# Altium PCB 24E_Ergo.PcbDoc
Units mm, origin at the board's own origin, x right, y up, seen from the top; angles counter-clockwise.
Board outline 152.4 x 101.6 mm, 4 copper layers (Top Layer, GND, PWR, Bottom Layer), stack 0.603 mm thick; 67 components, 60 nets, 266 pads, 0 vias.
Unrouted connection lines stored in the file: 154.
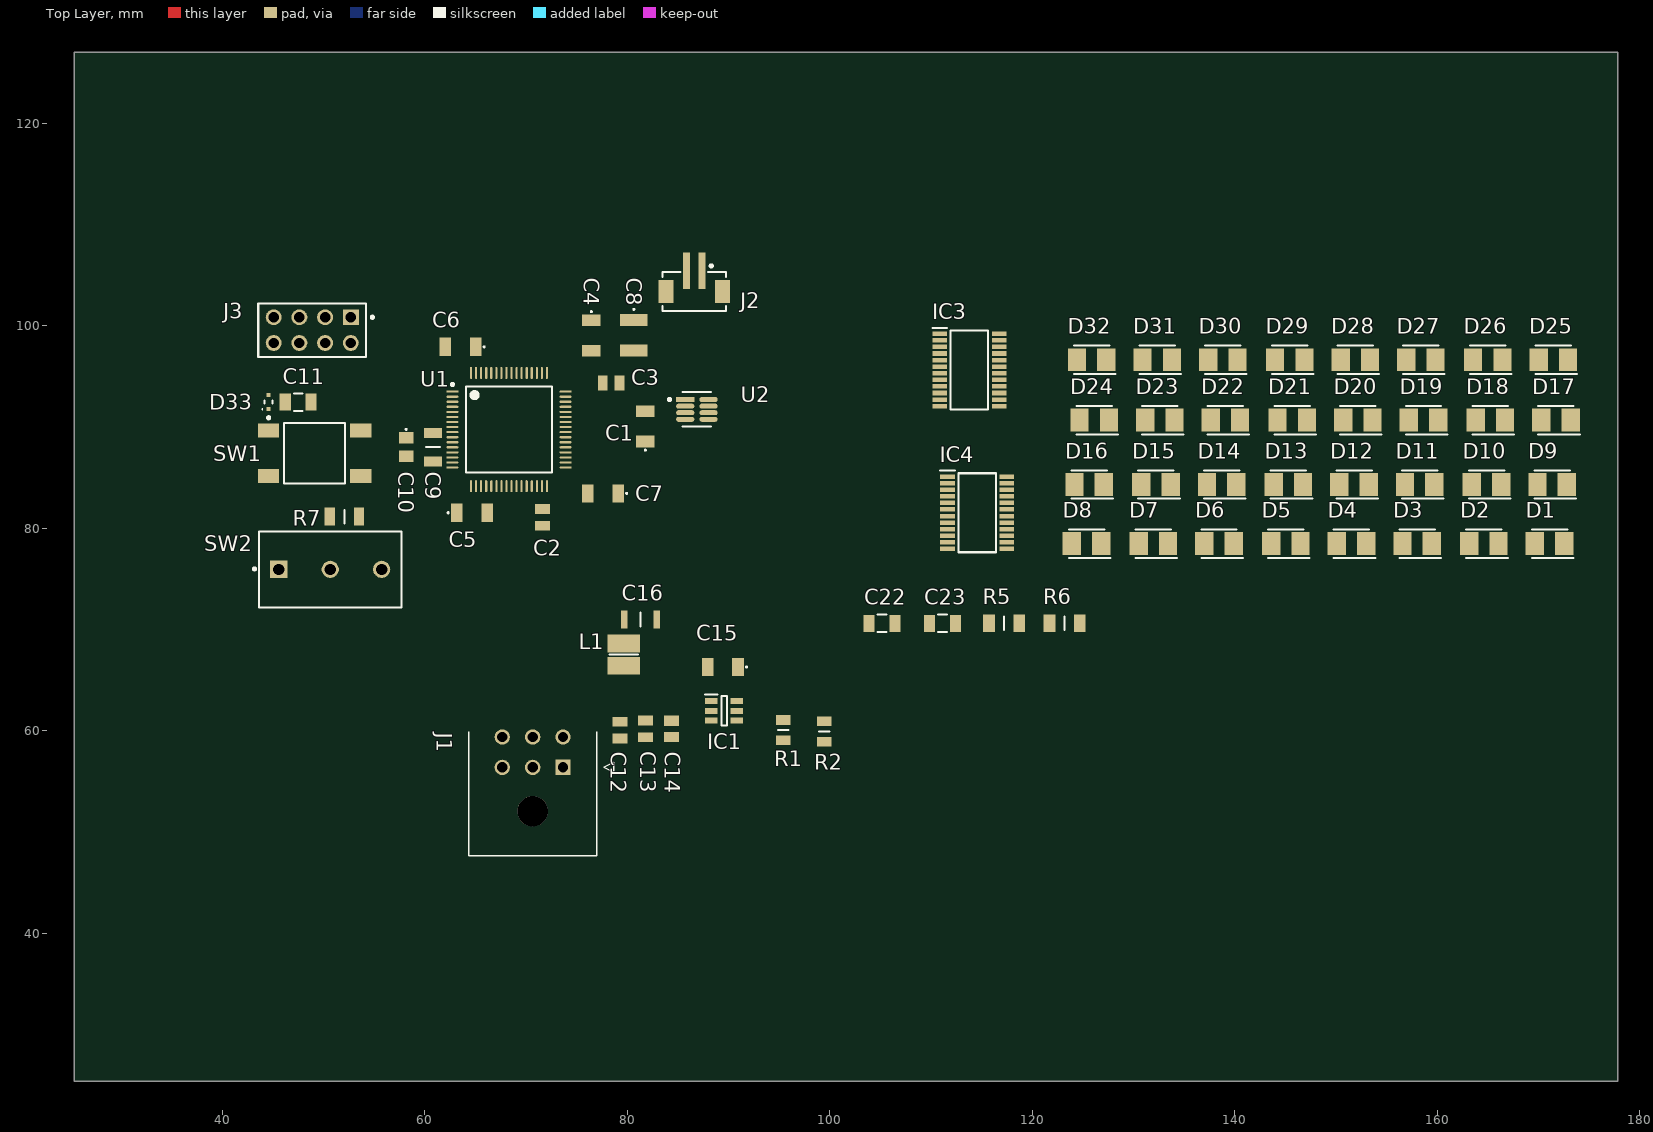
[diagram p0: Top Layer view]
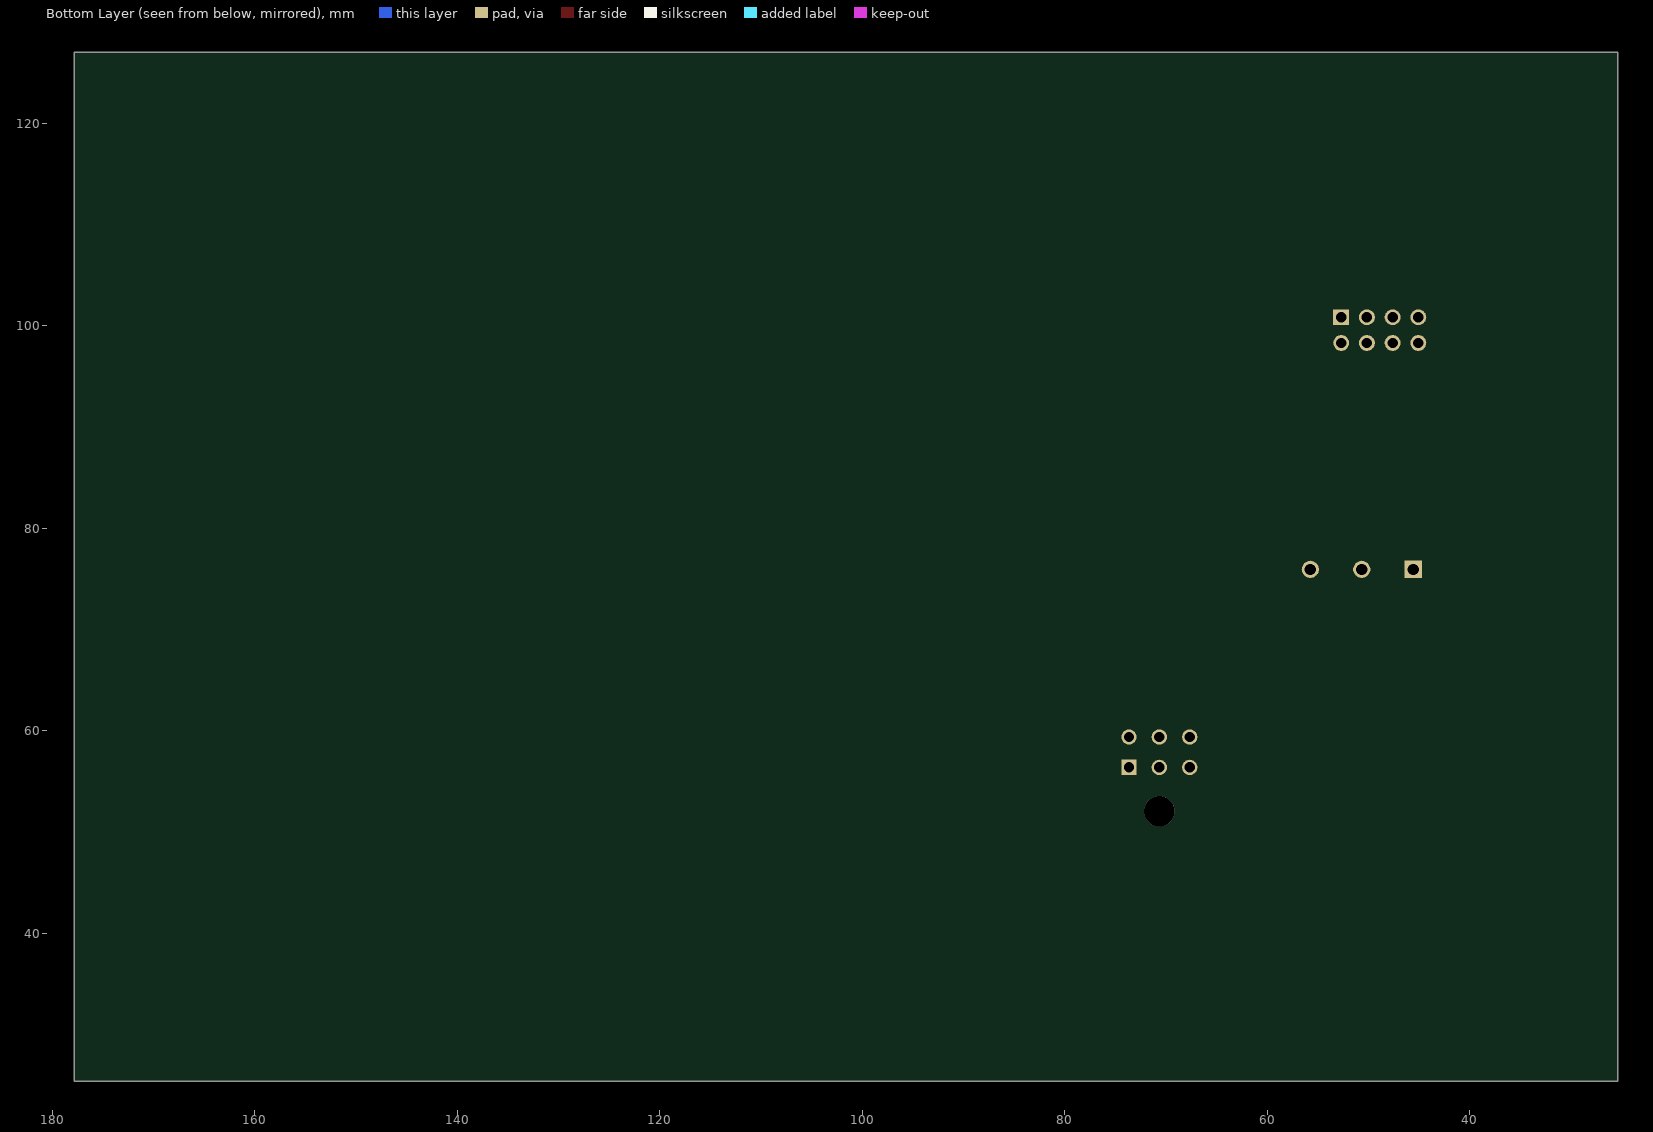
[diagram p1: Bottom Layer view, seen from below]
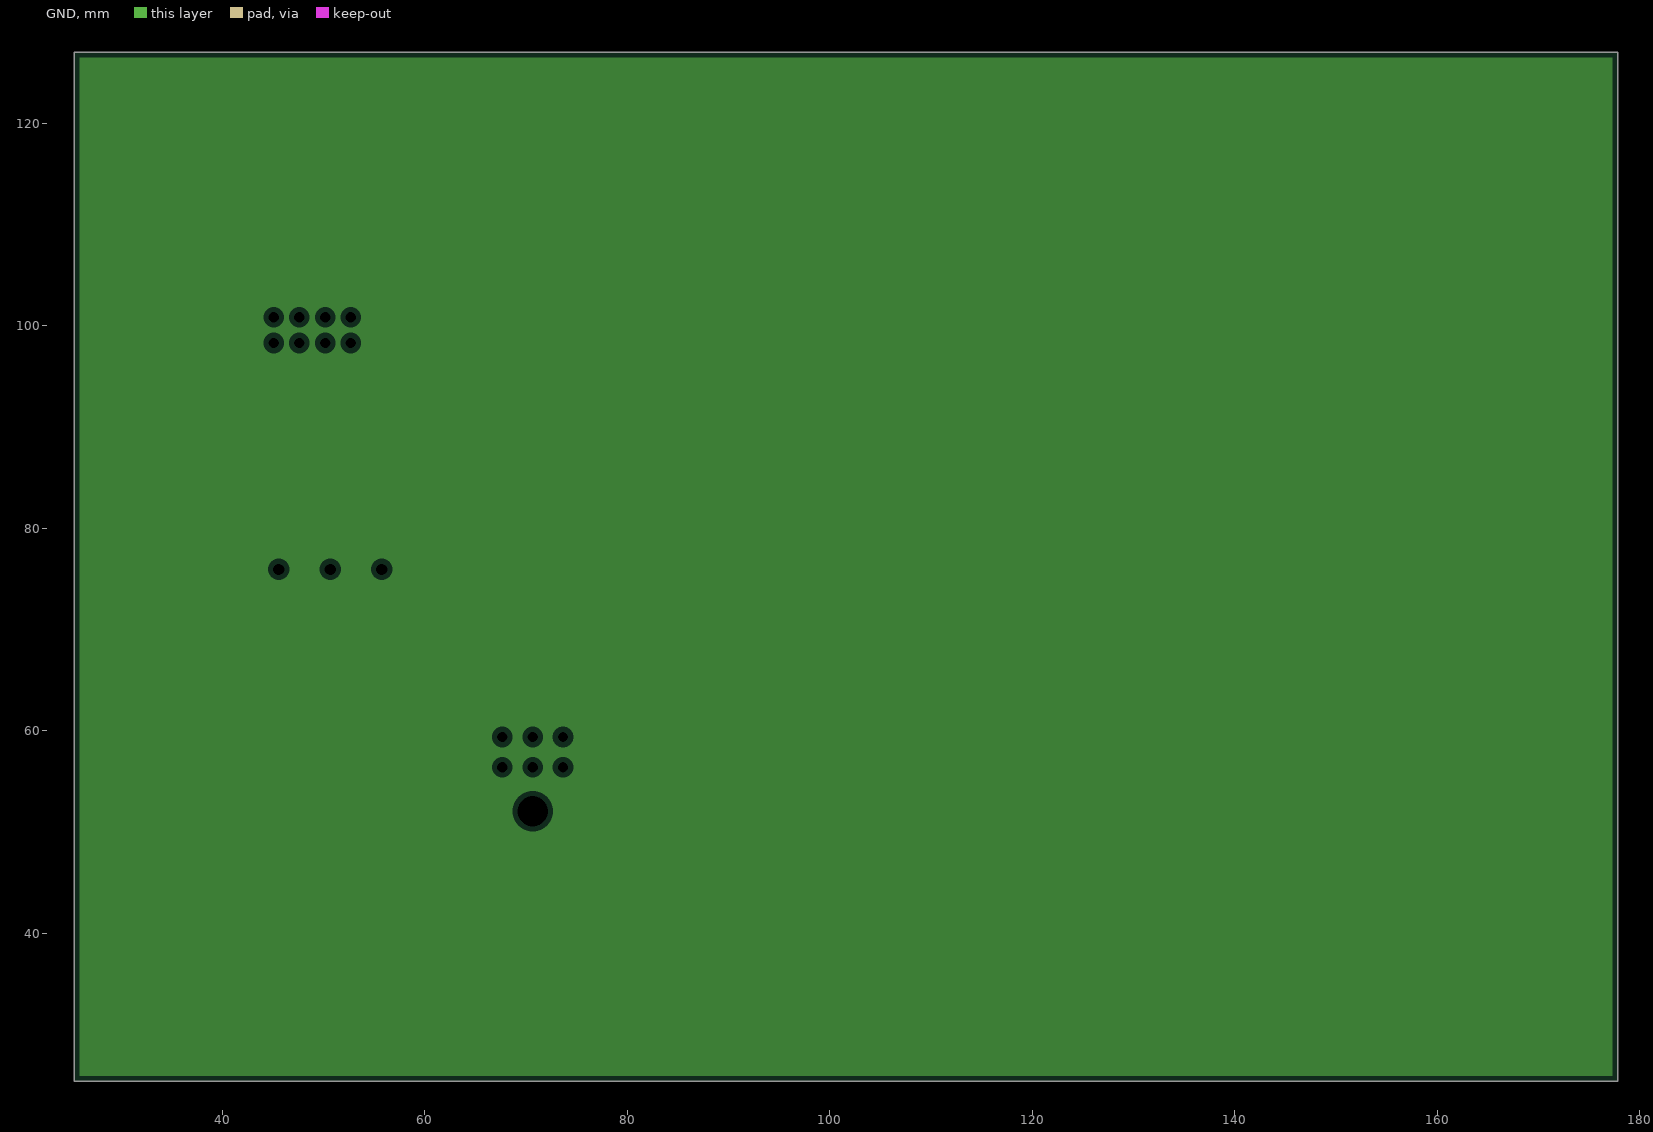
[diagram p2: GND, clearances drawn from the general rule]
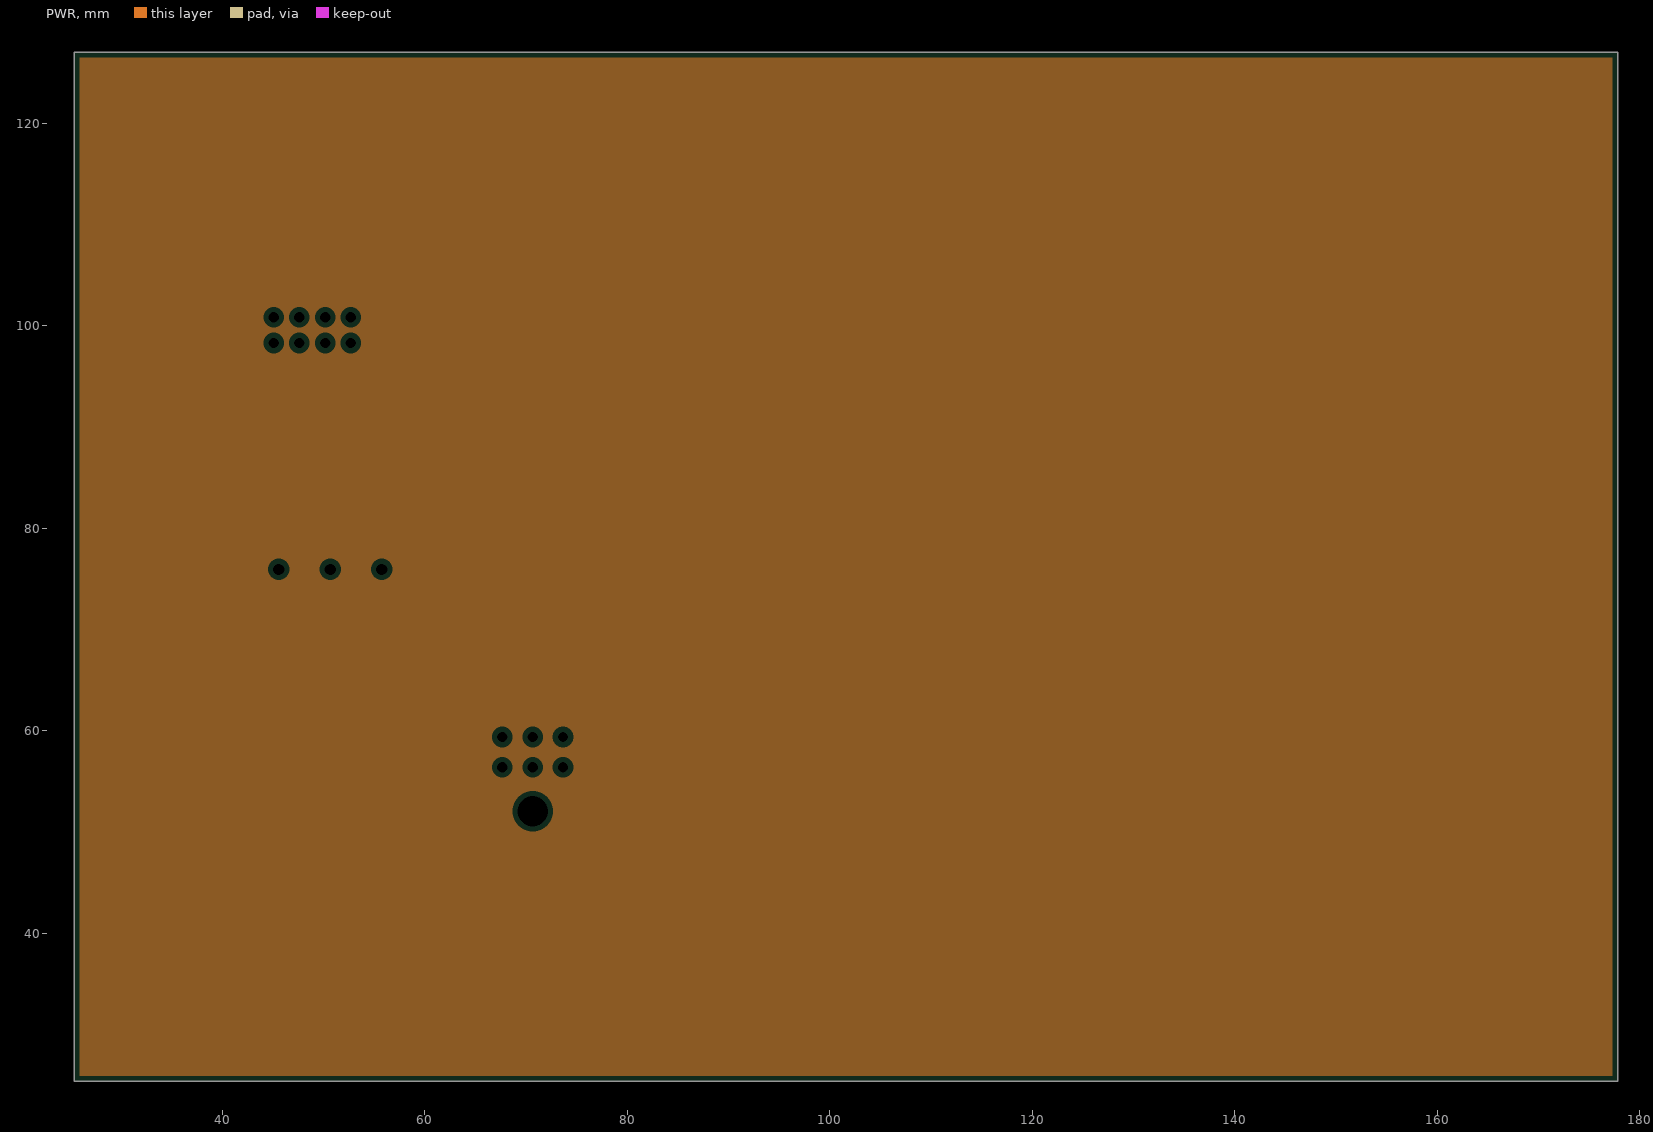
[diagram p3: PWR, clearances drawn from the general rule]

## Layer stack, top to bottom
Top Solder: solder mask 0.0102, Solder Resist, Dk 3.5
Top Layer: signal copper 0.0356
Dielectric 2: prepreg 0.0711, PP-006, Dk 4.1
GND: plane copper 0.035
Dielectric 1: dielectric 0.32, FR-4, Dk 4.8
PWR: plane copper 0.035
Dielectric 3: prepreg 0.0711, PP-006, Dk 4.1
Bottom Layer: signal copper 0.0356
Bottom Solder: solder mask 0.0102, Solder Resist, Dk 3.5

## Board outline
25.4,25.4 177.8,25.4 177.8,127 25.4,127

## Design rules (kind name [scope] priority, off if disabled: settings)
Clearance [All] p1: gap=0.254 ignorepadtopadclearanceinfootprint=FALSE
PlaneClearance [All] p1: clearance=0.508
PlaneConnect [All] p1: planeconnectstyle=Relief reliefexpansion=0.508 reliefentries=4 reliefconductorwidth=0.254 reliefairgap=0.254
PolygonConnect [All] p1: connectstyle=Relief reliefconductorwidth=0.254 reliefentries=4 polygonreliefangle="90 Angle" airgapwidth=0.254
RoutingVias [All] p1: holewidth=0.711 width=1.27 viastyle="Through Hole" minholewidth=0.711 minwidth=1.27 maxholewidth=0.711 maxwidth=1.27
SolderMaskExpansion [All] p1: expansion=0.102 istentingtop=FALSE
SupplyNets "Schematic Supply Nets_4" [InNet('+3.3 V')] p1: voltage=0.000
SupplyNets "Schematic Supply Nets_3" [InNet('+12.8V')] p2: voltage=0.000
SupplyNets "Schematic Supply Nets_2" [InNet('+3.3V')] p3: voltage=0.000
SupplyNets "Schematic Supply Nets_1" [InNet('EN')] p4: voltage=0.000
SupplyNets "Schematic Supply Nets" [InNet('+3V3')] p5: voltage=0.000
Width [All] p1: maxlimit=0.254 minlimit=0.254 preferedwidth=0.254
28 further rules are at their usual default settings.

## Components (designator, comment, footprint, x,y, rotation, side; value= is the part's Value field where it differs from the comment)
C1 "100nF" C1206 81.788,90.067 r90 top
C2 "2.2uF" CAPC2012X145N 71.628,81.085 r90 top
C3 "2.2uF" CAPC2012X145N 78.418,94.361 r0 top
C4 "100nF" C1206 76.454,99.036 r270 top
C5 "100nF" C1206 64.667,81.534 r0 top
C6 "100nF" C1206 63.524,97.917 r180 top
C7 "100nF" C1206 77.597,83.439 r180 top
C8 "4.7 uF" C1210 80.645,99.06 r270 top
C9 "100nF" CAPC3216X95N 60.833,88.011 r270 top
C10 "1.0uF" C0805 58.166,88.022 r270 top
C11 "100 nF" FP-CL31-IPC_C 47.498,92.456 r0 top
C12 "10uF" CAPC2012X145N 79.272,60.071 r270 top
C13 "10uF" CAPC2012X145N 81.812,60.198 r270 top
C14 "100nF" CAPC2012X88N 84.352,60.198 r270 top
C15 "C1206C104K3RACTU" C1206 89.432,66.294 r180 top
C16 "47uF" CAPC3216X180N 81.304,70.993 r0 top
C22 "CL31B104KBP5PNF" FP-CL31-IPC_C 105.156,70.612 r0 top
C23 "CL31B104KBP5PNF" FP-CL31-IPC_C 111.125,70.612 r0 top
D1 "LR_T64F-BBDB-1-1" LEDM3528X380N 171.069,78.486 r180 top
D2 "LR_T64F-BBDB-1-1" LEDM3528X380N 164.592,78.486 r180 top
D3 "LR_T64F-BBDB-1-1" LEDM3528X380N 157.988,78.486 r180 top
D4 "LR_T64F-BBDB-1-1" LEDM3528X380N 151.511,78.486 r180 top
D5 "LR_T64F-BBDB-1-1" LEDM3528X380N 145.034,78.486 r180 top
D6 "LR_T64F-BBDB-1-1" LEDM3528X380N 138.43,78.486 r180 top
D7 "LR_T64F-BBDB-1-1" LEDM3528X380N 131.953,78.486 r180 top
D8 "LR_T64F-BBDB-1-1" LEDM3528X380N 125.349,78.486 r180 top
D9 "LR_T64F-BBDB-1-1" LEDM3528X380N 171.323,84.328 r180 top
D10 "LR_T64F-BBDB-1-1" LEDM3528X380N 164.846,84.328 r180 top
D11 "LR_T64F-BBDB-1-1" LEDM3528X380N 158.242,84.328 r180 top
D12 "LR_T64F-BBDB-1-1" LEDM3528X380N 151.765,84.328 r180 top
D13 "LR_T64F-BBDB-1-1" LEDM3528X380N 145.288,84.328 r180 top
D14 "LR_T64F-BBDB-1-1" LEDM3528X380N 138.684,84.328 r180 top
D15 "LR_T64F-BBDB-1-1" LEDM3528X380N 132.207,84.328 r180 top
D16 "LR_T64F-BBDB-1-1" LEDM3528X380N 125.603,84.328 r180 top
D17 "LR_T64F-BBDB-1-1" LEDM3528X380N 171.704,90.678 r180 top
D18 "LR_T64F-BBDB-1-1" LEDM3528X380N 165.227,90.678 r180 top
D19 "LR_T64F-BBDB-1-1" LEDM3528X380N 158.623,90.678 r180 top
D20 "LR_T64F-BBDB-1-1" LEDM3528X380N 152.146,90.678 r180 top
D21 "LR_T64F-BBDB-1-1" LEDM3528X380N 145.669,90.678 r180 top
D22 "LR_T64F-BBDB-1-1" LEDM3528X380N 139.065,90.678 r180 top
D23 "LR_T64F-BBDB-1-1" LEDM3528X380N 132.588,90.678 r180 top
D24 "LR_T64F-BBDB-1-1" LEDM3528X380N 126.111,90.678 r180 top
D25 "LR_T64F-BBDB-1-1" LEDM3528X380N 171.45,96.647 r180 top
D26 "LR_T64F-BBDB-1-1" LEDM3528X380N 164.973,96.647 r180 top
D27 "LR_T64F-BBDB-1-1" LEDM3528X380N 158.369,96.647 r180 top
D28 "LR_T64F-BBDB-1-1" LEDM3528X380N 151.892,96.647 r180 top
D29 "LR_T64F-BBDB-1-1" LEDM3528X380N 145.415,96.647 r180 top
D30 "LR_T64F-BBDB-1-1" LEDM3528X380N 138.811,96.647 r180 top
D31 "LR_T64F-BBDB-1-1" LEDM3528X380N 132.334,96.647 r180 top
D32 "LR_T64F-BBDB-1-1" LEDM3528X380N 125.857,96.647 r180 top
D33 "ESD5B5.0ST1G" ONSC-SOD-523-2-502-01_C_V 44.577,92.456 r90 top
IC1 "TPS561201DDCR" SOT95P280X110-6N 89.559,61.976 r0 top
IC3 "STP16CP05TTR" SOP65P638X110-24N 113.792,95.631 r0 top
IC4 "STP16CP05TTR" SOP65P638X110-24N 114.554,81.534 r0 top
J1 "43045-0602" 43045-06(00,01,02,10) 73.66,56.388 r0 top
J2 "679302124022" 679302124022 86.62,103.378 r0 top
J3 "M20-9980446" FP-M20-9980446-MFG 48.895,99.568 r180 top
L1 "74438335033" INDC3030X150N 79.653,67.521 r90 top
R1 "33.2 kOhms" RESC2012X50N 95.401,60.071 r90 top
R2 "10 kOhms" RESC2012X50N 99.465,59.928 r270 top
R5 "ERA-8APB122V" RESC3216X70N 117.221,70.612 r0 top
R6 "ERA-8APB122V" RESC3216X70N 123.19,70.612 r0 top
R7 "10k" RESC3016X65N 52.07,81.153 r180 top
SW1 "FSM4JSMATR" TECO-FSM4JSMATR_V 49.127,87.412 r90 top
SW2 "25136NAH" FP-25136NAH-MFG 50.673,75.946 r90 top
U1 "STM32F405RGT6TR" FP-LQFP64-5W-IPC_C 68.323,89.745 r0 top
U2 "TCAN332DCNR" FP-DCN0008A-IPC_A 86.875,91.735 r0 top

## Footprints (in the part's own frame and the unit in brackets; to place one, negate y for a bottom-side part, rotate by r counter-clockwise, add the part's x,y. Pads: shape width x height; smd on the part's side, far side on the other; paste and mask are expansions set on the pad)
43045-06(00,01,02,10) [mm]
  rect 1.52x1.52 hole 1.02: 1(0,0)
  round 1.52 hole 1.02: 2(-3,0) 3(-6,0) 4(0,3) 5(-3,3) 6(-6,3)
  round 3 hole 3 unplated: 7(-3,-4.32)
  silkscreen extent -9.33,-8.72 5,3.52, body extent -9.58,-8.9 3.57,3.33, height 8.69
679302124022 [mm] "1.50mm SMT Male Vertical Shrouded Header, 2p"
  rect 0.7x3.6 smd: 1(0.75,2.05) 2(-0.75,2.05)
  rect 1.5x2.3 smd: MP1(-2.8,0) MP2(2.8,0)
  silkscreen extent -3.13,-1.92 3.13,2.65, body extent -3,-1.85 3,3.35, height 5.49
C0805 [mm]
  rect 1.15x1.45 smd: 1(-0.9,0) 2(0.9,0)
  silkscreen extent -1.8,-0.05 -1.7,0.05, body extent -1.17,-0.78 1.18,0.77, height 1.4
C1206 [mm]
  rect 1.15x1.8 smd: 1(-1.5,0) 2(1.5,0)
  silkscreen extent -2.4,-0.05 -2.3,0.05, body extent -1.7,-0.9 1.7,0.9, height 1.75
C1210 [mm]
  rect 1.15x2.7 smd: 1(-1.5,0) 2(1.5,0)
  silkscreen extent -2.6,-0.05 -2.5,0.05, body extent -1.75,-1.36 1.75,1.36, height 1
CAPC2012X88N [mm]
  rect 1.02x1.47 smd: 1(-0.8,0) 2(0.8,0)
  body extent -1.1,-0.73 1.1,0.72, height 0.88
CAPC2012X145N [mm]
  rect 0.97x1.47 smd: 1(-0.83,0) 2(0.83,0)
  body extent -1,-0.63 1,0.63, height 1.45
CAPC3216X95N [mm]
  rect 0.99x1.78 smd: 1(-1.4,0) 2(1.4,0)
  silkscreen extent 0,-0.7 0,0.7, body extent -1.6,-0.8 1.6,0.8, height 0.95
CAPC3216X180N [mm]
  rect 0.62x1.82 smd: 1(-1.6,0) 2(1.6,0)
  silkscreen extent 0,-0.7 0,0.7, body extent -1.65,-0.8 1.55,0.8, height 1.6
FP-25136NAH-MFG [mm]
  rect 1.7x1.7 hole 1.1 paste-2539.97 mask+0: 1(0,5.08)
  round 1.7 hole 1.1 paste-2539.97 mask+0: 2(0,0) 3(0,-5.08)
  silkscreen extent -3.75,-7.05 3.75,7.6, body extent -3.85,-7.15 3.85,7.15, height 0.25
FP-CL31-IPC_C [mm]
  rect 1.105x1.658 smd paste+0 mask+0: 1(-1.276,0) 2(1.276,0)
  silkscreen extent -0.42,-0.87 0.42,0.87, body extent -1.93,-0.97 1.93,0.97, height 0.25
FP-DCN0008A-IPC_A [mm]
  rect 1.805x0.495 smd paste+0 mask+0: 1(-1.15,0.975)
  rrect100% 1.805x0.495 smd paste+0 mask+0: 2(-1.15,0.325) 3(-1.15,-0.325) 4(-1.15,-0.975) 5(1.15,-0.975) 6(1.15,-0.325) 7(1.15,0.325) 8(1.15,0.975)
  silkscreen extent -2.82,-1.7 1.4,1.7, body extent -2.55,-1.95 2.55,1.95, height 0.25
FP-LQFP64-5W-IPC_C [mm]
  rect 1.188x0.212 smd paste+0 mask+0: 1(-5.591,3.75)
  rrect100% 1.188x0.212 smd paste+0 mask+0: 2(-5.591,3.25) 3(-5.591,2.75) 4(-5.591,2.25) 5(-5.591,1.75) 6(-5.591,1.25) 7(-5.591,0.75) 8(-5.591,0.25) 9(-5.591,-0.25) 10(-5.591,-0.75) 11(-5.591,-1.25) 12(-5.591,-1.75) 13(-5.591,-2.25) 14(-5.591,-2.75) 15(-5.591,-3.25) 16(-5.591,-3.75) 33(5.591,-3.75) 34(5.591,-3.25) 35(5.591,-2.75) 36(5.591,-2.25) 37(5.591,-1.75) 38(5.591,-1.25) 39(5.591,-0.75) 40(5.591,-0.25) 41(5.591,0.25) 42(5.591,0.75) 43(5.591,1.25) 44(5.591,1.75) 45(5.591,2.25) 46(5.591,2.75) 47(5.591,3.25) 48(5.591,3.75)
  rrect100% 0.212x1.188 smd paste+0 mask+0: 17(-3.75,-5.591) 18(-3.25,-5.591) 19(-2.75,-5.591) 20(-2.25,-5.591) 21(-1.75,-5.591) 22(-1.25,-5.591) 23(-0.75,-5.591) 24(-0.25,-5.591) 25(0.25,-5.591) 26(0.75,-5.591) 27(1.25,-5.591) 28(1.75,-5.591) 29(2.25,-5.591) 30(2.75,-5.591) 31(3.25,-5.591) 32(3.75,-5.591) 49(3.75,5.591) 50(3.25,5.591) 51(2.75,5.591) 52(2.25,5.591) 53(1.75,5.591) 54(1.25,5.591) 55(0.75,5.591) 56(0.25,5.591) 57(-0.25,5.591) 58(-0.75,5.591) 59(-1.25,5.591) 60(-1.75,5.591) 61(-2.25,5.591) 62(-2.75,5.591) 63(-3.25,5.591) 64(-3.75,5.591)
  silkscreen extent -5.72,-4.25 4.25,4.58, body extent -6.29,-6.29 6.29,6.29, height 0.25
FP-M20-9980446-MFG [mm]
  rect 1.57x1.57 hole 1.02 paste-2539.97 mask+0: 1(-3.81,-1.27)
  round 1.57 hole 1.02 paste-2539.97 mask+0: 2(-3.81,1.27) 3(-1.27,-1.27) 4(-1.27,1.27) 5(1.27,-1.27) 6(1.27,1.27) 7(3.81,-1.27) 8(3.81,1.27)
  silkscreen extent -6.06,-2.64 5.33,2.64, body extent -5.43,-2.74 5.43,2.74, height 0.25
INDC3030X150N [mm]
  rect 1.75x3.2 smd: 1(-1.1,0) 2(1.1,0)
  silkscreen extent 0,-1.4 0,1.4, body extent -1.5,-1.5 1.5,1.5, height 1.5
LEDM3528X380N [mm]
  rect 1.8x2.25 smd: 1(-1.45,0) 2(1.45,0)
  silkscreen extent -2.35,-1.4 1.75,1.4
ONSC-SOD-523-2-502-01_C_V [mm] "SOD, 2-Leads, Body 1.2x0.8mm"
  rect 0.4x0.4 smd: 1(-0.7,0) 2(0.7,0)
  silkscreen extent -0.75,-0.4 0.15,0.65, body extent -0.6,-0.4 0.6,0.4, height 0.7
RESC2012X50N [mm]
  rect 0.95x1.45 smd: 1(-1,0) 2(1,0)
  silkscreen extent 0,-0.53 0,0.53, body extent -1,-0.62 1,0.63, height 0.45
RESC3016X65N [mm]
  rect 1x1.75 smd: 1(-1.45,0) 2(1.45,0)
  silkscreen extent 0,-0.67 0,0.67, body extent -1.53,-0.77 1.53,0.77, height 0.65
RESC3216X70N [mm]
  rect 1.15x1.7 smd: 1(-1.5,0) 2(1.5,0)
  silkscreen extent 0,-0.67 0,0.67
SOP65P638X110-24N [mm]
  rect 1.45x0.45 smd: 1(-2.925,3.575) 2(-2.925,2.925) 3(-2.925,2.275) 4(-2.925,1.625) 5(-2.925,0.975) 6(-2.925,0.325) 7(-2.925,-0.325) 8(-2.925,-0.975) 9(-2.925,-1.625) 10(-2.925,-2.275) 11(-2.925,-2.925) 12(-2.925,-3.575) 13(2.925,-3.575) 14(2.925,-2.925) 15(2.925,-2.275) 16(2.925,-1.625) 17(2.925,-0.975) 18(2.925,-0.325) 19(2.925,0.325) 20(2.925,0.975) 21(2.925,1.625) 22(2.925,2.275) 23(2.925,2.925) 24(2.925,3.575)
  silkscreen extent -3.65,-3.9 1.85,4.15, body extent -3.19,-3.9 3.19,3.9, height 1.1
SOT95P280X110-6N [mm]
  rect 1.25x0.6 smd: 1(-1.25,0.95) 2(-1.25,0) 3(-1.25,-0.95) 4(1.25,-0.95) 5(1.25,0) 6(1.25,0.95)
  silkscreen extent -1.88,-1.45 0.28,1.6, body extent -1.4,-1.45 1.4,1.45, height 1.1
TECO-FSM4JSMATR_V [mm] "SMD, 4-Leads, Body 6x6mm, Pitch 4.5mm"
  rect 1.4x2.1 smd: 1(2.25,4.55) 2(2.25,-4.55) 3(-2.25,4.55) 4(-2.25,-4.55)
  silkscreen extent -3,-3 3.62,4.67, body extent -3,-5 3,5, height 5.08

## Part data
C1 C4 C5 C6 C7: library part C1206C104K5RACTU, "Capacitor", Manufacturer_Name=KEMET, Mouser Part Number=80-C1206C104K5R, Arrow Part Number=C1206C104K5RACTU, Arrow Price/Stock=https://www.arrow.com/en/products/c1206c104k5ractu/kemet-corporation?region=nac, Datasheet Link=https://content.kemet.com/datasheets/KEM_C1002_X7R_SMD.pdf, Manufacturer_Part_Number=C1206C104K5RACTU, Mouser Price/Stock=https://www.mouser.co.uk/ProductDetail/KEMET/C1206C104K5RACTU?qs=VbFpUC1cecnmBMAUeCQCPw%3D%3D
C2 C3: library part C2012X5R1V225K125AB, "Capacitor", Manufacturer_Name=TDK, Mouser Part Number=810-C2012X5R1V225KAB, Arrow Part Number=C2012X5R1V225K125AB, Arrow Price/Stock=https://www.arrow.com/en/products/c2012x5r1v225k125ab/tdk, Datasheet Link=https://product.tdk.com/info/en/catalog/datasheets/mlcc_commercial_midvoltage_en.pdf, Height=1.45mm, Manufacturer_Part_Number=C2012X5R1V225K125AB, Mouser Price/Stock=https://www.mouser.co.uk/ProductDetail/TDK/C2012X5R1V225K125AB?qs=6JAMGB%252BEdkx9Qe2qZwx06Q%3D%3D
C8: library part C1210C475K8RACTU, "Capacitor", Manufacturer_Name=KEMET, Mouser Part Number=80-C1210C475K8R, Datasheet Link=https://content.kemet.com/datasheets/KEM_C1002_X7R_SMD.pdf, Manufacturer_Part_Number=C1210C475K8RACTU, Mouser Price/Stock=https://www.mouser.co.uk/ProductDetail/KEMET/C1210C475K8RACTU?qs=oz8GmW2iRsteX%252BuxrlEukQ%3D%3D
C9: library part CC1206KRX7R8BB104, "Capacitor", Manufacturer_Name=YAGEO, Mouser Part Number=603-CC206KRX7R8BB104, Arrow Part Number=CC1206KRX7R8BB104, Arrow Price/Stock=https://www.arrow.com/en/products/cc1206krx7r8bb104/yageo?region=nac, Datasheet Link=https://4donline.ihs.com/images/VipMasterIC/IC/YAGO/YAGO-S-A0011723860/YAGO-S-A0011723860-1.pdf?hkey=6D3A4C79FDBF58556ACFDE234799DDF0, Height=0.95mm, Manufacturer_Part_Number=CC1206KRX7R8BB104, Mouser Price/Stock=https://www.mouser.co.uk/ProductDetail/YAGEO/CC1206KRX7R8BB104?qs=AgBp2OyFlx%2Fzdk9Exx7Hmw%3D%3D
C10: library part C0805X105K3RACTU, "Capacitor", Manufacturer_Name=KEMET, Mouser Part Number=80-C0805X105K3RACTU, Arrow Part Number=C0805X105K3RACTU, Arrow Price/Stock=https://www.arrow.com/en/products/c0805x105k3ractu/kemet-corporation?region=nac, Datasheet Link=https://content.kemet.com/datasheets/KEM_C1013_X7R_FT-CAP_SMD.pdf, Height=1.1mm, Manufacturer_Part_Number=C0805X105K3RACTU, Mouser Price/Stock=https://www.mouser.co.uk/ProductDetail/KEMET/C0805X105K3RACTU?qs=8Lo7A5hKj2SKGRiy4muzQg%3D%3D
C11 C22 C23: library part CMP-13271-001835-1, "Cap Ceramic 100nF 50V X7R ±10% SMD 1206 +125°C Embossed T/R", Capacitance=100nF, Case Code (Imperial)=1206, Case Code (Metric)=3216, Dielectric=X7R, Max Operating Temperature=125°C, Min Operating Temperature=-55°C, Ratings=AEC-Q200, Tolerance=10%, Voltage Rating=50V, Case/Package=1206, Mount="Surface Mount", Packaging="Tape and Reel"
C12 C13: library part GRM21BR61E106MA73L, "Capacitor", Manufacturer_Name="Murata Electronics", Mouser Part Number=81-GRM21BR61E106MA3L, Arrow Part Number=GRM21BR61E106MA73L, Arrow Price/Stock=https://www.arrow.com/en/products/grm21br61e106ma73l/murata-manufacturing?region=nac, Datasheet Link=http://www.murata.com/~/media/webrenewal/support/library/catalog/products/capacitor/mlcc/c02e.pdf, Height=1.45mm, Manufacturer_Part_Number=GRM21BR61E106MA73L, Mouser Price/Stock=https://www.mouser.co.uk/ProductDetail/Murata-Electronics/GRM21BR61E106MA73L?qs=2W5sgKM%2F371odLMyCilkag%3D%3D
C14: library part C0805C104K5RAC7800, "Capacitor", Manufacturer_Name=KEMET, Mouser Part Number=80-C0805C104K5R7800, Arrow Part Number=C0805C104K5RAC7800, Arrow Price/Stock=https://www.arrow.com/en/products/c0805c104k5rac7800/kemet-corporation?region=europe, Datasheet Link=https://www.kemet.com/specsheet/C0805C104K5RACTU, Height=0.88mm, Manufacturer_Part_Number=C0805C104K5RAC7800, Mouser Price/Stock=https://www.mouser.co.uk/ProductDetail/KEMET/C0805C104K5RAC7800?qs=hmjAPdsEpYaK3AnCUxDrTA%3D%3D
C15: "Capacitor", Manufacturer_Name=KEMET, Mouser Part Number=80-C1206C104K3R, Arrow Part Number=C1206C104K3RACTU, Arrow Price/Stock=https://www.arrow.com/en/products/c1206c104k3ractu/kemet-corporation?region=nac, Datasheet Link=https://content.kemet.com/datasheets/KEM_C1002_X7R_SMD.pdf, Manufacturer_Part_Number=C1206C104K3RACTU, Mouser Price/Stock=https://www.mouser.co.uk/ProductDetail/KEMET/C1206C104K3RACTU?qs=NAOyRStS94fxtmvbMSuVXw%3D%3D
C16: library part C3216X5R1E476M160AC, "Capacitor", Manufacturer_Name=TDK, Mouser Part Number=810-C3216X5R1E476M, Arrow Part Number=C3216X5R1E476M160AC, Arrow Price/Stock=https://www.arrow.com/en/products/c3216x5r1e476m160ac/tdk?region=nac, Datasheet Link=https://product.tdk.com/info/en/catalog/datasheets/mlcc_commercial_midvoltage_en.pdf, Height=1.8mm, Manufacturer_Part_Number=C3216X5R1E476M160AC, Mouser Price/Stock=https://www.mouser.co.uk/ProductDetail/TDK/C3216X5R1E476M160AC?qs=NRhsANhppD%252BqapdVvBvu4Q%3D%3D
D1 D2 D3 D4 D5 D6 D7 D8 D9 D10 D11 D12 D13 D14 D15 D16 D17 D18 D19 D20 D21 D22 D23 D24 D25 D26 D27 D28 D29 D30 D31 D32: "Standard LEDs - SMD Red", Manufacturer_Name="ams OSRAM", Manufacturer_Part_Number="LR T64F-BBDB-1-1", Mouser Part Number=720-LRT64FBBDB11, Datasheet Link=https://dammedia.osram.info/media/resource/hires/osram-dam-2493734/LR%20T64F.pdf, Geometry.Height=3.8mm, Mouser Price/Stock=https://www.mouser.co.uk/ProductDetail/OSRAM-Opto-Semiconductors/LR-T64F-BBDB-1-1/?qs=bPsF1HUXLcPgtbSUB%252BvpOg%3D%3D
D33: library part CMP-1063-00096-1, "Transient Voltage Suppressor, Micro-Packaged Diode for ESD Protection, 2-Pin SOD-523, Pb-Free, Tape and Reel", Manufacturer="On Semiconductor", ComponentLink1Description="Manufacturer URL", ComponentLink1URL=http://www.onsemi.com/, ComponentLink2Description=Datasheet, ComponentLink2URL=http://www.onsemi.cn/pub_link/Collateral/ESD5B5.0ST1G.PDF, ComponentLink3Description="Package Specification", ComponentLink3URL=http://www.onsemi.cn/pub_link/Collateral/ESD5B5.0ST1G.PDF, DatasheetVersion="Rev. 3", Direction=Bidirectional, IR Max (uA)=1, Mounting Technology="Surface Mount", Number of Lines=1, PackageDescription="2-Pin SOD, Body 1.2 x 0.8 mm", PackageReference=SOD-523-2-502-01_C, PackageVersion="Rev. C, 03/2007", Packing="Tape and Reel", PartNumber=ESD5B5.0ST1G, RoHS=Pb-Free, V(BR) Min (V)=5.8, VRWM Max (V)=5
IC1: "Integrated Circuit", Manufacturer_Name="Texas Instruments", Mouser Part Number=595-TPS561201DDCR, Arrow Part Number=TPS561201DDCR, Arrow Price/Stock=https://www.arrow.com/en/products/tps561201ddcr/texas-instruments?region=nac, Datasheet Link=http://www.ti.com/lit/gpn/tps561201, Height=1.1mm, Manufacturer_Part_Number=TPS561201DDCR, Mouser Price/Stock=https://www.mouser.co.uk/ProductDetail/Texas-Instruments/TPS561201DDCR?qs=5aG0NVq1C4ySUOSRQSt9MQ%3D%3D
IC3 IC4: "STMICROELECTRONICS - STP16CP05TTR - IC LED SINK DRIVER, 16-BIT, LO V", Manufacturer_Name=STMicroelectronics, Mouser Part Number=511-STP16CP05TTR, Datasheet Link=http://www.st.com/web/en/resource/technical/document/datasheet/CD00126634.pdf, Geometry.Height=1.1mm, Manufacturer_Part_Number=STP16CP05TTR, Mouser Price/Stock=https://www.mouser.co.uk/ProductDetail/STMicroelectronics/STP16CP05TTR?qs=%252BFmDY%2FmH7IYvcBEvWgB%2FVQ%3D%3D
J1: "Connector", Manufacturer_Name=Molex, Mouser Part Number=538-43045-0602, Datasheet Link=https://www.molex.com/pdm_docs/sd/430450200_sd.pdf, Height=9.9mm, Manufacturer_Part_Number=43045-0602, Mouser Price/Stock=https://www.mouser.co.uk/ProductDetail/Molex/43045-0602?qs=mrPiglD9aYLv9OehwOZTng%3D%3D
J2: library part CMP-1502-00721-2, Color="Beige, White", Contact Resistance=20mΩ, Current Rating=1A, Flammability Rating="UL94 V-0", Insulation Resistance=100MΩ, Max Operating Temperature=85°C, Min Operating Temperature=-25°C, Operating Supply Voltage=50V, Connector Type="Male Pin", Contact Gender=Male, Contact Material=Copper, Contact Plating=Tin, Gender=Male, Height=5mm, Housing Material=Nylon, Insulation=Insulated, Lead Pitch=1.5mm, Length=6mm, Mount="Surface Mount", NexarPartId=18818281, Number of Contacts=2, Number of Pins=2, Number of Positions=2, Number of Rows=1, Orientation=Vertical, Packaging="Tape and Reel", Pitch=1.5mm, REACH SVHC=Unknown, RoHS=Compliant, Termination=SMD/SMT, Voltage Rating=50V, Width=6mm
J3: library part CMP-15831-000088-1, "CONN HEADER VERT 8POS 2.54MM", Color=Black, Contact Resistance=30mR, Current Rating=3A, Flammability Rating="UL94 V-0", Insulation Resistance=10GR, Max Operating Temperature=105°C, Min Operating Temperature=-40°C, Package Quantity=1000, Connector Type="Male Pin", Contact Finish - Mating=TIN, Contact Material=Brass, Contact Mating Length=0.24inch, Contact Plating=Tin, Contact Shape=Square, Contact Type="Male Pin", Depth=5.08mm, Fastening Type=Pull, Gender=Male, Housing Color=Black, Housing Material=Nylon, Insulation Color=Black, Insulation Material=Nylon, Length=10.16mm, Mated Stacking Heights=16.54mm, Max Current Rating=3A, Mount="Through Hole", Number of Contacts=8, Number of Positions=8, Number of Rows=2, Orientation=Straight, Packaging=Bulk, Pitch=2.54mm, Radiation Hardening=No, REACH SVHC="No SVHC", RoHS Compliant=Yes, Row Spacing=0.1inch, Series=M20, Termination=Solder
L1: "Inductor", Manufacturer_Name="Wurth Elektronik", Mouser Part Number=710-74438335033, Datasheet Link=http://katalog.we-online.de/pbs/datasheet/74438335033.pdf, Height=1.5mm, Manufacturer_Part_Number=74438335033, Mouser Price/Stock=https://www.mouser.com/Search/Refine.aspx?Keyword=710-74438335033
R1: library part CRCW080533K2FKEA, "Resistor", Manufacturer_Name=Vishay, Mouser Part Number=71-CRCW0805-33.2K-E3, Arrow Part Number=CRCW080533K2FKEA, Arrow Price/Stock=https://www.arrow.com/en/products/crcw080533k2fkea/vishay, Datasheet Link=http://www.vishay.com/docs/20035/dcrcwe3.pdf, Height=0.5mm, Manufacturer_Part_Number=CRCW080533K2FKEA, Mouser Price/Stock=https://www.mouser.co.uk/ProductDetail/Vishay-Dale/CRCW080533K2FKEA?qs=TrAHXYCGmqwCGFI79n%252BHHA%3D%3D
R2: library part CRCW080510K0FKEA, "Resistor", Manufacturer_Name=Vishay, Mouser Part Number=71-CRCW0805-10K-E3, Arrow Part Number=CRCW080510K0FKEA, Arrow Price/Stock=https://www.arrow.com/en/products/crcw080510k0fkea/vishay?region=europe, Datasheet Link=http://www.vishay.com/docs/20035/dcrcwe3.pdf, Height=0.5mm, Manufacturer_Part_Number=CRCW080510K0FKEA, Mouser Price/Stock=https://www.mouser.co.uk/ProductDetail/Vishay-Dale/CRCW080510K0FKEA?qs=LOX6nxTstiZjDFtI%2F0c8Lw%3D%3D
R5 R6: "Thin Film Resistors - SMD 1206 Thin film chip resistor", Manufacturer_Name=Panasonic, Mouser Part Number=667-ERA-8APB122V, Datasheet Link=https://industrial.panasonic.com/cdbs/www-data/pdf/RDM0000/AOA0000C307.pdf, Geometry.Height=0.7mm, Manufacturer_Part_Number=ERA-8APB122V, Mouser Price/Stock=https://www.mouser.co.uk/ProductDetail/Panasonic/ERA-8APB122V?qs=PgLP5Altfoz8TeGz8FyJXw%3D%3D
R7: library part RP73D2B10KBTDF, "Resistor", Manufacturer_Name="TE Connectivity", Mouser Part Number=279-RP73D2B10KBTDF, Arrow Part Number=RP73D2B10KBTDF, Arrow Price/Stock=https://www.arrow.com/en/products/rp73d2b10kbtdf/te-connectivity?region=nac, Datasheet Link=https://www.te.com/commerce/DocumentDelivery/DDEController?Action=srchrtrv&DocNm=8-1773459-4_ELEVATOR_ESCALATOR_SOLUTIONS&DocType=Data%20Sheet&DocLang=English&PartCntxt=6-1879261-8&DocFormat=pdf, Height=0.65mm, Manufacturer_Part_Number=RP73D2B10KBTDF, Mouser Price/Stock=https://www.mouser.co.uk/ProductDetail/TE-Connectivity-Holsworthy/RP73D2B10KBTDF?qs=8G8kQhBkhGisIrE0IZvSPA%3D%3D
SW1: library part CMP-2000-07486-1, "Micro Miniature Push Button Switch FSM JSM, 50 mA, -35 to 85 degC, 4-Pin SMD, RoHS, Tape and Reel", Capacitance=0f, Case\/Package=SMD/SMT, Contact Current Rating=50mA, Contact Resistance=100mOhm, Manufacturer="TE Connectivity", Max Operating Temperature=85degC, Max Voltage Rating (DC)=12V, Min Operating Temperature=-35degC, Operating Force=160gf, Package Description="4-Pin Surface Mount Device, Body 6 x 6 mm, Pitch 4.5 mm", Package Quantity=1200, Voltage Rating (DC)=24V, Actuator Length=0.055inch, Actuator Material=Polyamide, Contact Material=CopperAlloy, Contact Plating=Silver, Current Rating=50mA, Datasheet URL=http://www.te.com/commerce/DocumentDelivery/DDEController?Action=showdoc&DocId=Customer+Drawing%7F2-1437565-7%7FV%7Fpdf%7FEnglish%7FENG_CD_2-1437565-7_V.pdf%7F4-1437565-2, Datasheet Version="Rev. V, 02/2015", Electrical Life=100000Cycles, Illumination Type=Illuminated, Manufacturer URL=http://www.te.com/, Mechanical Life=100000Cycles, Mount=SurfaceMount, Mounting Technology=SurfaceMount, Orientation=Straight, Package Reference=FSM4JSMATR, Packaging=TapeandReel, REACH SVHC=Unknown, RoHSCompliant=true, Switch Travel=0.25mm, Termination=GullWing, Throw Configuration=SPST
SW2: library part CMP-47022-000001-1, "SWITCH SLIDE SPDT 4A 125V", Contact Current Rating=4A, Contact Resistance=10mR, Current Rating=1A, Insulation Resistance=1GR, Max Operating Temperature=85°C, Max Voltage Rating (AC)=250V, Max Voltage Rating (DC)=30V, Min Operating Temperature=-40°C, Package Quantity=100, Voltage Rating (AC)=125V, Actuator Length=2.8mm, Actuator Material=Nylon, Actuator Type=Standard, Contact Material=Silver, Contact Plating=Silver, Depth=7.5mm, Electrical Life=10000Cycles, Illumination Type=Non-Illuminated, Length=14.1mm, Max Current Rating=1A, Mechanical Life=20000Cycles, Mount="Through Hole", Orientation=Vertical, Packaging=Bulk, REACH SVHC="No SVHC", Switch Function=On-On, Switch Travel=4mm, Termination="PC Pins", Throw Configuration=SPDT, Voltage Rating (DC)=30V
U1: library part CMP-0243-00156-2, "IC MCU 32BIT 1MB FLASH 64LQFP", Case/Package=LQFP, Frequency=168MHz, Max Operating Temperature=85°C, Max Power Dissipation=435mW, Max Supply Voltage=3.6V, Min Operating Temperature=-40°C, Min Supply Voltage=1.8V, Package Quantity=1000, Contact Plating=Tin, Core Architecture=ARM, Data Bus Width=32b, Height=1.45mm, Interface=I2C, Lead Free="Lead Free", Length=10mm, Max Frequency=168MHz, Memory Size=1024KB, Memory Type=FLASH, Mount="Surface Mount", Number of ADC Channels=16, Number of I2C Channels=3, Number of I/Os=51, Number of Pins=64, Number of Programmable I/O=51, Number of SPI Channels=3, Number of Timers/Counters=14, Number of UART Channels=2, Number of USB Channels=2, Oscillator Type=Internal, Packaging="Tape and Reel", Peripherals="Brown-out Detect/Reset", Radiation Hardening=No, RAM Size=196KB, Watchdog Timer=Yes, Width=10mm
U2: library part CMP-04872-000203-1, "IC TRANSCEIVER 1/1 SOT23-8", Case/Package=SOT-23-8, Max Operating Temperature=125°C, Min Operating Temperature=-40°C, Lead Free="Lead Free", Mount="Surface Mount", Packaging="Tape and Reel", Receiver Hysteresis=120mV, RoHS Compliant=Yes

## Nets (pads, with @x,y where several pads share a name; then routed paths per layer and width w, separated by ;. In a path a pad name is that pad's centre, name@x,y a point inside that pad or via, vN(x,y) a via of type N, cw(c..) or ccw(c..) an arc to the next point about the centre after c; other vN are vias at no path point)
"+3.3 V": C4.2 C5.2 C6.2 C7.2 C8.2
+3.3V: C9.2 C10.2 C16.1 C22.1 C23.1 D1.2 D2.2 D3.2 D4.2 D5.2 D6.2 D7.2 D8.2 D9.2 D10.2 D11.2 D12.2 D13.2 D14.2 D15.2 D16.2 D17.2 D18.2 D19.2 D20.2 D21.2 D22.2 D23.2 D24.2 D25.2 D26.2 D27.2 D28.2 D29.2 D30.2 D31.2 D32.2 IC3.24 IC4.24 L1.2 R1.2 SW2.1
+3V3: C1.2 J3.2 U1.1 U1.13 U1.19 U1.32 U1.48 U1.64 U2.3
+12.8V: J1.1 J1.2 J1.3
"CAN RX": U1.44 U2.4
"CAN TX": U1.45 U2.1
"Daisy Chain": IC3.22 IC4.2
EN: C1.1 C2.1 C3.1 C4.1 C5.1 C6.1 C7.1 C8.1 C9.1 C10.1 C11.2 C12.1 C12.2 C13.1 C13.2 C14.1 C14.2 C16.2 C22.2 C23.2 D33.2 IC1.1 IC1.3 IC1.5 IC3.1 IC4.1 J1.4 J1.5 J1.6 J3.8 R2.1 R5.1 R6.1 SW1.4 SW2.3 U1.12 U1.18 U1.63 U2.2
JTCK-SWCLK: J3.3 U1.49
JTDI: J3.7 U1.50
JTDO-SWO: J3.5 U1.55
JTMS-SWDIO: J3.1 U1.46
NetC2_2: C2.2 U1.31
NetC3_2: C3.2 U1.47
NetC15_1: C15.1 IC1.6
NetD1_1: D1.1 IC3.20
NetD2_1: D2.1 IC3.19
NetD3_1: D3.1 IC3.18
NetD4_1: D4.1 IC3.17
NetD5_1: D5.1 IC3.16
NetD6_1: D6.1 IC3.15
NetD7_1: D7.1 IC3.14
NetD8_1: D8.1 IC3.13
NetD9_1: D9.1 IC3.12
NetD10_1: D10.1 IC3.11
NetD11_1: D11.1 IC3.10
NetD12_1: D12.1 IC3.9
NetD13_1: D13.1 IC3.8
NetD14_1: D14.1 IC3.7
NetD15_1: D15.1 IC3.6
NetD16_1: D16.1 IC3.5
NetD17_1: D17.1 IC4.20
NetD18_1: D18.1 IC4.19
NetD19_1: D19.1 IC4.18
NetD20_1: D20.1 IC4.17
NetD21_1: D21.1 IC4.16
NetD22_1: D22.1 IC4.15
NetD23_1: D23.1 IC4.14
NetD24_1: D24.1 IC4.13
NetD25_1: D25.1 IC4.12
NetD26_1: D26.1 IC4.11
NetD27_1: D27.1 IC4.10
NetD28_1: D28.1 IC4.9
NetD29_1: D29.1 IC4.8
NetD30_1: D30.1 IC4.7
NetD31_1: D31.1 IC4.6
NetD32_1: D32.1 IC4.5
NetIC1_4: IC1.4 R1.1 R2.2
NetIC3_2: IC3.2
NetIC3_3: IC3.3 IC4.3
NetIC3_4: IC3.4 IC4.4 U1.27
NetIC3_21: IC3.21 IC4.21 U1.26
NetIC3_23: IC3.23 R5.2
NetIC4_23: IC4.23 R6.2
NetJ2_1: J2.1 U2.6
NetJ2_2: J2.2 U2.7
NetR7_1: R7.1 U1.60
NetR7_2: R7.2 SW2.2
RST: C11.1 D33.1 J3.4 SW1.1 U1.7
SW: C15.2 IC1.2 L1.1
pads on no net: IC4.22 J1.7 J2.MP1 J2.MP2 J3.6 SW1.2 SW1.3 U1.2 U1.3 U1.4 U1.5 U1.6 U1.8 U1.9 U1.10 U1.11 U1.14 U1.15 U1.16 U1.17 U1.20 U1.21 U1.22 U1.23 U1.24 U1.25 U1.28 U1.29 U1.30 U1.33 U1.34 U1.35 U1.36 U1.37 U1.38 U1.39 U1.40 U1.41 U1.42 U1.43 U1.51 U1.52 U1.53 U1.54 U1.56 U1.57 U1.58 U1.59 U1.61 U1.62 U2.5 U2.8

## Polygon pours and split planes (outlines as drawn)
no net on GND (split plane): 177.29,25.91 25.91,25.91 25.91,126.49 177.29,126.49
no net on PWR (split plane): 177.29,25.91 25.91,25.91 25.91,126.49 177.29,126.49